# EAGLE board LEDLightSticks_V2--02--Power_Dist_PCB_v10 (EAGLE 9.7.0)
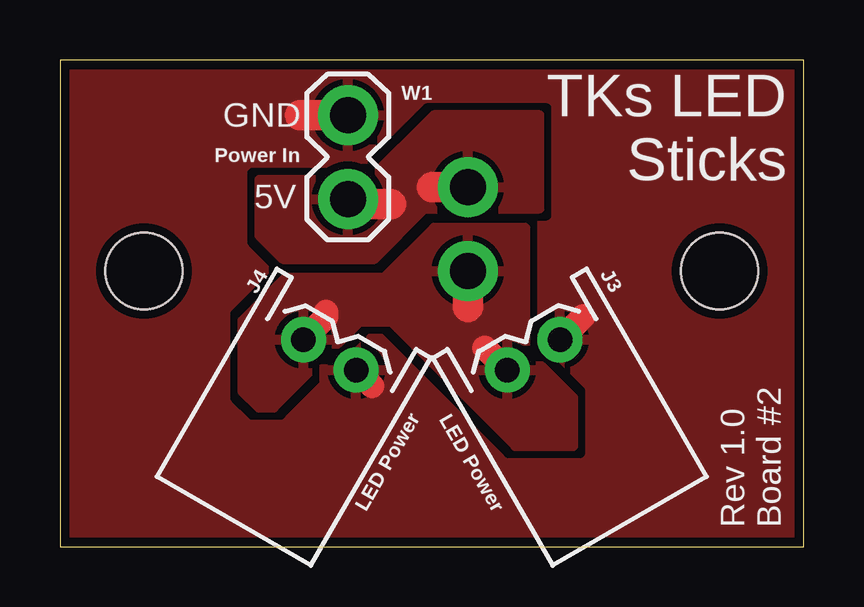
[diagram p0: board, top side]
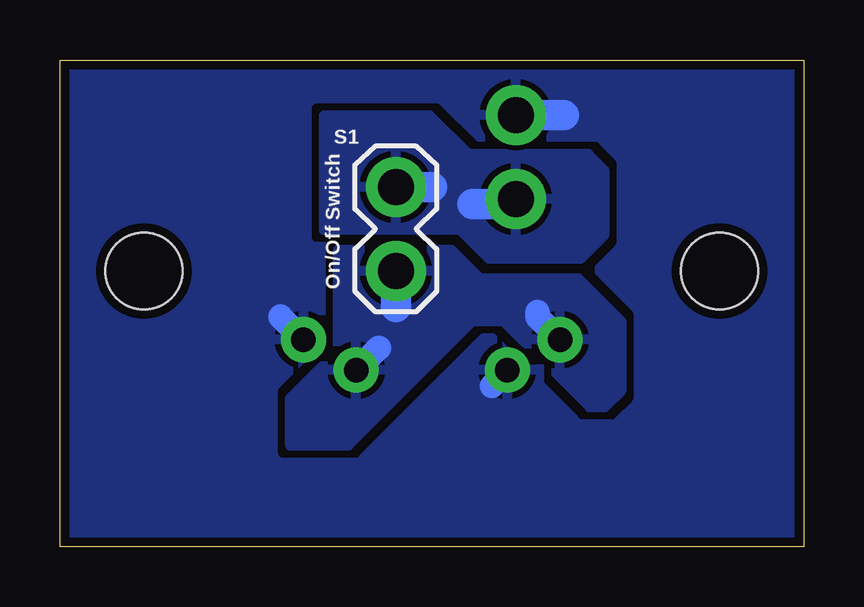
[diagram p1: board, bottom side, seen from below]

Size 31 x 20.3 mm. Coordinates in mm from the lower left corner, seen from the top.
Outline: 0,0 31,0 31,20.3 0,20.3 0,0
Copper layers (1*16): Top 0.035mm / dielectric 1.5mm / Bottom 0.035mm
Design rules "TKs_CustomDRU": minimum track width 10mil, minimum drill 20mil, track to track 8mil, track to pad 8mil, pad to pad 8mil, via to via 8mil, smd to smd 8mil, copper to edge 15mil, drill to drill 15mil, minimum pad ring 12mil, minimum via ring 10mil, stop-mask expansion 4mil, vias tented up to drill 20mil, thermal gap 10mil
Holes 3.2 mm at 27.5,11.5 3.5,11.5

## Footprints (pad centres in the part's own frame; a part is rotated, then mirrored left to right if it is on the bottom)
JST-2-PTH-XH-RA = drill 1.016 pad 1.88: 1 -1.27,0; 2 1.27,0
1X02_1.5MM = drill 1.5 pad 2.5: 1 3.5,0; 2 0,0

## Placement (x,y rotation side)
J3  LED Power  [JST-2-PTH-XH-RA]  19.75,8 210 top
J4  LED Power  [JST-2-PTH-XH-RA]  11.25,8 150 top
S1  On/Off Switch  [1X02_1.5MM]  17,15 270 bottom
W1  Power In  [1X02_1.5MM]  12,18 270 top

## Library data of the parts
J3 J4 S1 W1 = LED_Light_Sticks_Library

## Nets
GND: J3.1 J4.1 W1.2
VCC: J3.2 J4.2 S1.1
VIN: S1.2 W1.1

## Tracks (layer width: path | path; a pad name or v marks a point on that pad's centre or on a via)
GND
  Top 1.016: J3.1 21.8,9.59 21.8,9.6 | J4.1 13,6.71 13,6.7
  Top 1.27: W1.2 10.01,17.99 10,18
  Bottom 1.016: J3.1 21.8,9.59 21.8,9.6 | J4.1 13,6.71 13,6.7
  Bottom 1.27: W1.2 10.01,17.99 10,18
  pour Bottom (isolate 0.305, rank 2): 0.2,0.2 30.8,0.2 30.8,20.1 0.2,20.1
  pour Top (isolate 0.305, rank 2): 0.2,0.2 30.8,0.2 30.8,20.1 0.2,20.1
VCC
  Top 1.016: J4.2 11.1,9.59 11.1,9.8 | J3.2 17.71,8.3 17.7,8.3
  Top 1.27: S1.1 17,10
  Bottom 1.016: J4.2 11.1,9.59 11.1,9.8 | J3.2 17.71,8.3 17.7,8.3
  Bottom 1.27: S1.1 17,10
  pour Top: 13.74,9.4 13.82,9.37 18.98,4.2 21.4,4.2 21.4,6.22 19.43,8.18 19.4,8.26 19.4,13.3 15.58,13.3 13.52,11.23 13.44,11.2 9.38,11.2 7.6,9.42 7.6,6.48 8.28,5.8 8.92,5.8 12.48,9.37 12.56,9.4
  pour Bottom: 12.48,9.37 12.56,9.4 13.74,9.4 13.82,9.37 18.98,4.2 21.4,4.2 21.4,6.22 19.43,8.18 19.4,8.26 19.4,12.4 14.68,12.4 13.52,11.23 13.44,11.2 9.38,11.2 7.6,9.42 7.6,6.48 8.28,5.8 8.92,5.8
VIN
  Top 1.27: 13.8,14.3 12.2,14.3 W1.1 | S1.2 15.51,14.99 15.5,15
  Bottom 1.27: S1.2 15.51,14.99 15.5,15 | 13.8,14.3 12.2,14.3 W1.1
  pour Top: 15.58,18 12.92,15.33 12.84,15.3 8.3,15.3 8.3,12.98 9.28,12 13.12,12 15.18,14.07 15.26,14.1 20,14.1 20,18
  pour Bottom: 15.58,18 14.02,16.43 13.94,16.4 8.98,16.4 8.3,15.72 8.3,12.98 9.28,12 13.12,12 14.28,13.17 14.36,13.2 20,13.2 20,18

## Text on the board
tPlace: GND | TKs LED / Sticks | 5V | Rev 1.0 / Board #2